# Altium PCB Logger_PCB_6.PcbDoc (part 2 of 2)
Units mm, origin at the board's own origin, x right, y up, seen from the top; angles counter-clockwise.
Board outline 91.13 x 59.14 mm, 2 copper layers (Top Layer, Bottom Layer); 117 components, 70 nets, 364 pads, 397 vias.
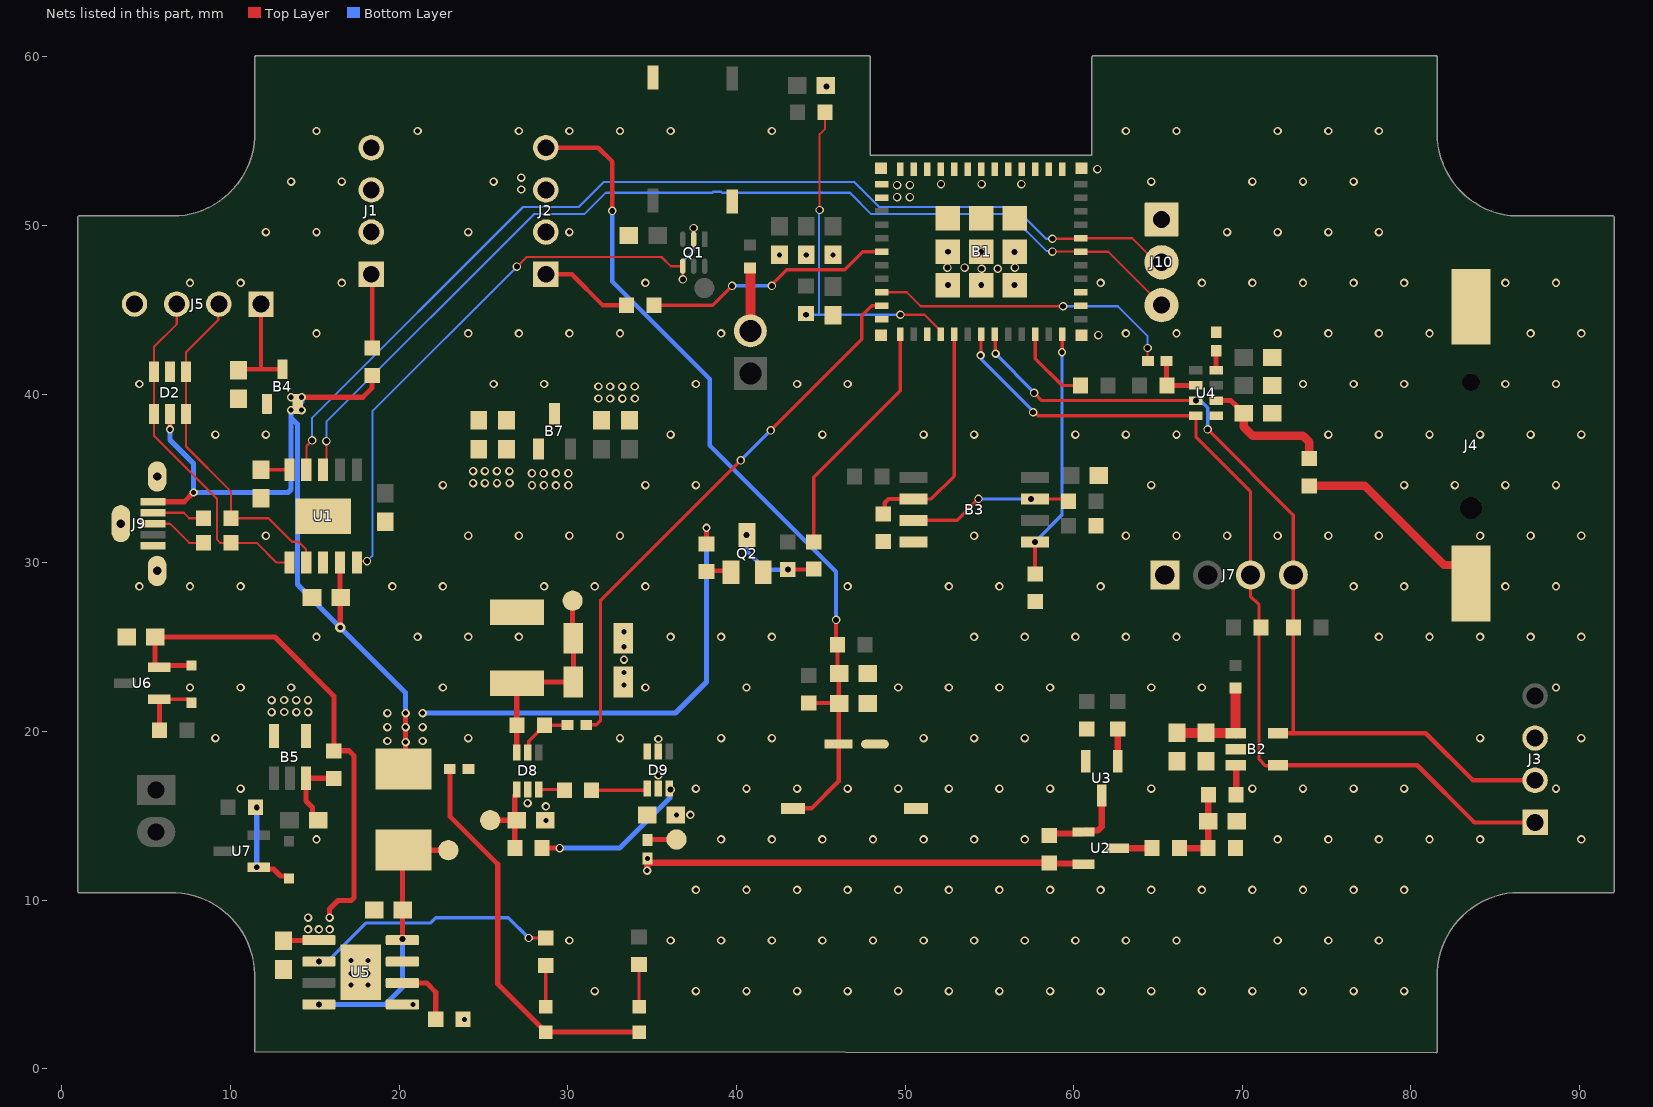
[diagram p2: the nets of this part, all layers, seen from the top]

## Via types
v1: diameter 0.5, hole 0.3, Top Layer to Bottom Layer, tented both sides, 325 vias
v2: diameter 0.5, hole 0.35, Top Layer to Bottom Layer, tented both sides, 71 vias
v3: diameter 0.6, hole 0.3, Top Layer to Bottom Layer, tented both sides, 1 vias

## Nets (pads, with @x,y where several pads share a name; then routed paths per layer and width w, separated by ;. In a path a pad name is that pad's centre, name@x,y a point inside that pad or via, vN(x,y) a via of type N, cw(c..) or ccw(c..) an arc to the next point about the centre after c; other vN are vias at no path point) (continued)
ESP_VBAT: B1.15 R4.2 R5.2 | length 20.8
  Top Layer w0.127: v2(44.133,44.704) R4.2@44.133,44.779 ; v2(44.937,50.916) 44.937,55.415 45.264,55.741 R5.2@45.264,56.706 ; v2(49.721,44.704) 51.157,44.704 52.121,43.74 B1.15@52.121,43.54
  Bottom Layer w0.127: v2(44.133,44.704) 44.894,44.704 ; v2(44.937,50.916) 44.895,50.873 44.895,44.704 ; v2(49.721,44.704) 44.894,44.704
FLASH_SDI: B1.24 B3.5 R18.2 | length 14.9
  Top Layer w0.2: v1(59.309,42.481) 59.315,42.487 59.315,43.534 B1.24@59.321,43.54
  Top Layer w0.254: B3.5@57.702,31.242 v2(57.71,31.234) 57.71,29.337 R18.2@57.721,29.325
  Bottom Layer w0.2: v2(57.71,31.234) 59.309,32.833 v1(59.309,42.481)
FLASH_SDO: B1.16 B3.2 R17.2 | length 13.9
  Top Layer w0.2: B3.2@50.502,33.782 51.562,33.782 52.921,35.141 B1.16@52.921,43.54
  Top Layer w0.254: R17.2@48.704,32.881 48.799,32.976 48.799,33.559 49.022,33.782 B3.2@50.502,33.782
GND: B1.1 B1.2 B1.11 B1.14 B1.36 B1.37 B1.38 B1.39 B1.40 B1.41 B1.42 B1.43 B1.44 B1.45 B1.46 B1.47 B1.48 B1.49 B1.50 B1.51 B1.52 B1.53 B1.54 B1.55 B1.56 B1.57 B1.58 B1.59 B1.60 B1.61 B2.2 B3.4 B4.1 B5.4 B5.5 B7.1 C1.1 C2.1 C3.1 C4.1 C5.1 C6.1 C7.1 C8.1 C9.1 C10.2 C11.1 C12.1 C13.1 C14.1 C15.1 C16.1 C17.1 C18.1 C19.2 C20.1 C21.1 C22.1 C24.1 C25.1 C26.1 C27.1 C28.1 C29.1 C30.1 C31.1 D1.A D2.2 D8.2 D9.2 D9.5 J1.2 J2.2 J2.3 J3.3 J4.2 J5.4 J7.1 J9.5 J9.SH1 J9.SH2 J9.SH3 J10.1 Q2.E R12.2 R14.1 R17.1 R18.1 R19.1 R20.2 R28.1 SW1.2 SW2.2 SW3.2 U1.0 U1.3 U3.2 U4.5 U5.1 U5.3 U5.9
  other v1: 23.876,2.921 20.828,3.81 31.6,4.6 37.6,4.6 40.6,4.6 43.6,4.6 46.6,4.6 49.6,4.6 52.6,4.6 55.6,4.6 58.6,4.6 61.6,4.6 64.6,4.6 67.6,4.6 70.6,4.6 73.6,4.6 76.6,4.6 79.6,4.6 17.145,4.953 18.161,4.953 17.145,5.651 18.161,5.651 17.145,6.413 18.161,6.413 30.1,7.6 36.1,7.6 39.1,7.6 42.1,7.6 45.1,7.6 48.1,7.6 51.1,7.6 54.1,7.6 57.1,7.6 60.1,7.6 63.1,7.6 66.1,7.6 72.1,7.6 75.1,7.6 78.1,7.6 37.6,10.6 40.6,10.6 43.6,10.6 46.6,10.6 49.6,10.6 52.6,10.6 55.6,10.6 58.6,10.6 61.6,10.6 64.6,10.6 67.6,10.6 70.6,10.6 73.6,10.6 76.6,10.6 79.6,10.6 15.1,13.6 39.1,13.6 42.1,13.6 45.1,13.6 48.1,13.6 51.1,13.6 54.1,13.6 57.1,13.6 72.1,13.6 75.1,13.6 78.1,13.6 81.1,13.6 84.1,13.6 90.1,13.6 28.714,14.722 36.449,15.05 37.274,15.05 28.702,15.557 27.622,15.748 10.6,16.6 37.6,16.6 40.6,16.6 43.6,16.6 46.6,16.6 49.6,16.6 52.6,16.6 55.6,16.6 58.6,16.6 64.6,16.6 70.6,16.6 73.6,16.6 76.6,16.6 79.6,16.6 88.6,16.6 35.369,17.399 35.369,19.549 9.1,19.6 24.1,19.6 33.1,19.6 39.1,19.6 42.1,19.6 51.1,19.6 54.1,19.6 57.1,19.6 84.1,19.6 90.1,19.6 12.446,21.145 13.906,21.145 14.605,21.145 13.189,21.149 12.44,21.856 13.901,21.856 14.599,21.856 13.183,21.859 7.6,22.6 10.6,22.6 13.6,22.6 22.6,22.6 34.6,22.6 40.6,22.6 49.6,22.6 52.6,22.6 55.6,22.6 58.6,22.6 64.6,22.6 67.6,22.6 88.6,22.6 33.337,22.74 33.337,23.486 33.337,24.257 33.337,25.019 15.1,25.6 21.1,25.6 24.1,25.6 27.1,25.6 36.1,25.6 39.1,25.6 42.1,25.6 54.1,25.6 57.1,25.6 60.1,25.6 63.1,25.6 66.1,25.6 78.1,25.6 81.1,25.6 84.1,25.6 87.1,25.6 90.1,25.6 33.337,25.908 4.6,28.6 7.6,28.6 10.6,28.6 19.6,28.6 22.6,28.6 28.6,28.6 31.6,28.6 34.6,28.6 46.6,28.6 52.6,28.6 55.6,28.6 61.6,28.6 76.6,28.6 79.6,28.6 85.6,28.6 88.6,28.6 12.1,31.6 24.1,31.6 27.1,31.6 30.1,31.6 33.1,31.6 54.1,31.6 63.1,31.6 66.1,31.6 69.1,31.6 72.1,31.6 75.1,31.6 78.1,31.6 84.1,31.6 87.1,31.6 90.1,31.6 22.6,34.6 27.882,34.596 28.581,34.596 29.298,34.592 30.041,34.596 34.6,34.6 37.6,34.6 64.6,34.6 79.6,34.6 82.6,34.6 85.6,34.6 88.6,34.6 24.39,34.723 25.088,34.723 25.806,34.719 26.549,34.723 27.877,35.306 28.575,35.306 29.293,35.302 30.035,35.306 24.384,35.433 25.082,35.433 25.8,35.429 26.543,35.433 9.1,37.6 12.1,37.6 36.1,37.6 45.1,37.6 51.1,37.6 54.1,37.6 60.1,37.6 63.1,37.6 66.1,37.6 75.1,37.6 78.1,37.6 81.1,37.6 84.1,37.6 87.1,37.6 90.1,37.6 33.235,39.736 31.819,39.739 32.518,39.739 33.978,39.739 31.813,40.45 32.512,40.45 33.23,40.446 33.972,40.45 4.6,40.6 25.6,40.6 28.6,40.6 37.6,40.6 43.6,40.6 46.6,40.6 73.6,40.6 76.6,40.6 79.6,40.6 85.6,40.6 88.6,40.6 15.1,43.6 24.1,43.6 27.1,43.6 30.1,43.6 33.1,43.6 39.1,43.6 63.1,43.6 66.1,43.6 72.1,43.6 75.1,43.6 78.1,43.6 81.1,43.6 87.1,43.6 90.1,43.6 7.6,46.6 10.6,46.6 16.6,46.6 34.6,46.6 61.6,46.6 67.6,46.6 70.6,46.6 73.6,46.6 76.6,46.6 79.6,46.6 85.6,46.6 88.6,46.6 42.556,48.256 44.143,48.256 45.731,48.256 12.1,49.6 15.1,49.6 24.1,49.6 30.1,49.6 69.1,49.6 72.1,49.6 75.1,49.6 78.1,49.6 27.241,52.133 13.6,52.6 16.6,52.6 25.6,52.6 64.6,52.6 70.6,52.6 73.6,52.6 76.6,52.6 27.241,52.832 15.1,55.6 21.1,55.6 27.1,55.6 30.1,55.6 33.1,55.6 36.1,55.6 42.1,55.6 63.1,55.6 66.1,55.6 72.1,55.6 75.1,55.6 78.1,55.6
  other v2: 61.468,43.497 52.546,46.465 54.521,46.465 56.496,46.465 54.546,47.434 55.499,47.434 52.514,47.498 53.53,47.498 56.515,47.498 52.546,48.44 54.521,48.44 56.49,48.434 49.53,51.685 50.292,51.685 49.53,52.387 50.292,52.387 52.133,52.451 54.546,52.451 56.896,52.451 61.404,53.34 45.332,58.229
IND_LED_P: J1.1 R26.1 | length 4.4
  Top Layer w0.254: J1.1@18.351,47.11 18.415,47.046 R26.1@18.415,42.724
IND_LED_S: J2.1 R37.1 | length 5.5
  Top Layer w0.254: J2.1@28.702,47.11 30.233,47.11 32.067,45.276 R37.1@33.476,45.276
LED: B1.6 R37.2 | length 14.9
  Top Layer w0.2: R37.2@35.104,45.276 38.608,45.276 v2(39.751,46.419) ; v2(42.1,46.419) 42.1,46.482 42.986,47.368 46.415,47.368 47.487,48.44 B1.6@48.621,48.44 B1.6@48.632,48.45
  Bottom Layer w0.2: v2(39.751,46.419) v2(42.1,46.419)
LOG: B1.22 R6.1 | length 4.8
  Top Layer w0.2: B1.22@57.721,43.54 57.721,42.101 59.309,40.513 R6.1@60.412,40.513
M_SW: F1.1 J1.3
Mout: C24.2 C25.2 D8.6 D9.6 F1.2 R35.1 TP3.TP? | length 12.3
  Top Layer w0.305: D8.6@26.972,18.753 26.972,22.84 F1.2@26.987,22.855 27.056,22.924 C24.2@30.338,22.924 C25.2@30.338,25.527 30.29,25.576 TP3.TP?@30.29,27.749
NetB2_1: B2.1 C12.2 C13.2 FB2.1 | length 6.2
  Top Layer w0.6: C13.2@66.125,19.916 66.137,19.904 B2.1@69.605,19.904 ; FB2.1@69.596,22.566 69.596,19.913 B2.1@69.605,19.904 ; B2.1@69.618,19.892 B2.1@69.605,19.904
NetB2_3: B2.3 R13.1 | length 1.7
  Top Layer w0.381: B2.3@69.618,17.992 69.638,17.972 R13.1@69.638,16.251
NetB4_3: B4.3 C19.1 J5.1 | length 6.5
  Top Layer w0.254: C19.1@10.477,41.427 10.525,41.474 11.803,41.474 ; J5.1@11.811,45.339 11.811,41.482 11.803,41.474 ; B4.3@13.081,41.474 11.803,41.474
NetB5_3: B5.3 C23.2 R31.1 | length 5.5
  Top Layer w0.305: B5.3@14.478,17.226 14.478,16.864 14.478,16.717 14.478,15.875 14.867,15.486 14.867,15.066 C23.2@15.201,14.732 ; B5.3@14.623,16.717 14.476,16.864 B5.3@14.476,17.228 14.484,17.22 R31.1@16.129,17.22 16.109,17.22 R31.1@15.817,16.928
NetC11_2: C11.2 U1.10 | length 1.7
  Top Layer w0.2: C11.2@11.811,35.521 13.489,35.521 U1.10@13.494,35.516
NetC14_2: C14.2 R10.1 R13.2 R14.2 | length 4.9
  Top Layer w0.381: R10.1@66.282,13.081 R14.2@67.968,13.081 67.989,13.102 67.989,16.23 R13.2@68.01,16.251
NetC26_2: C26.2 D8.1 R34.1 R38.2 TP2.TP? | length 5.1
  Top Layer w0.305: TP2.TP?@25.4,14.732 C26.2@26.858,14.732 ; R34.1@26.858,13.081 C26.2@26.858,14.732 ; C26.2@26.963,14.732 C26.2@26.858,14.732 ; D8.1@26.972,16.553 26.972,16.303 26.858,16.189 C26.2@26.858,14.732
NetC27_2: C27.2 D9.1 R36.2 R39.2 TP4.TP? | length 5.1
  Top Layer w0.2: R36.2@31.421,16.51 34.626,16.51 D9.1@34.719,16.603
  Top Layer w0.305: R39.2@34.734,13.567 34.745,13.578 36.438,13.578 TP4.TP?@36.449,13.589
NetD4_1: D4.1 R30.2 | length 2.5
  Top Layer w0.2: D4.1@34.227,3.671 R30.2@34.227,6.171
NetD5_1: D5.1 R29.2 | length 2.4
  Top Layer w0.2: D5.1@28.702,3.671 R29.2@28.702,6.108
NetD6_1: D6.1 R32.2 U6.1 | length 3.8
  Top Layer w0.2: U6.1@5.779,21.91 7.47,21.91 D6.1@7.683,21.696
  Top Layer w0.305: U6.1@5.779,21.91 5.79,21.898 R32.2@5.79,20.066
NetD7_2: D7.2 R33.1 U7.1 | length 5.8
  Top Layer w0.305: v2(11.559,11.94) 11.668,11.832 12.552,11.832 12.963,11.421 13.324,11.421 D7.2@13.462,11.282 ; U7.1@11.65,11.94 U7.1@11.684,11.94
  Bottom Layer w0.305: v2(11.557,15.494) 11.559,15.492 v2(11.559,11.94)
NetD8_3: D8.3 R36.1 | length 1.5
  Top Layer w0.2: D8.3@28.273,16.553 29.75,16.553 R36.1@29.793,16.51
NetD9_3: D9.3 R34.2 | length 9.3
  Top Layer w0.305: R34.2@28.486,13.081 v2(29.527,13.081)
  Bottom Layer w0.305: v2(29.527,13.081) 33.084,13.081 36.061,16.059 36.061,16.504 v2(36.099,16.542)
NetFB1_2: FB1.2 J8.2 | length 3.7
  Top Layer w0.6: J8.2@40.831,43.752 FB1.2@40.831,47.463
NetJ4_1: J4.1 R22.1 | length 12.1
  Top Layer w0.5: R22.1@73.977,34.556 77.268,34.556 81.959,29.865 82.666,29.865 83.566,28.965 J4.1@83.566,28.779
NetJ9_2: J9.2 R42.1 | length 3.1
  Top Layer w0.127: J9.2@5.402,32.966 7.23,32.966 7.556,32.639 R42.1@8.394,32.639
NetJ9_3: J9.3 R41.1 | length 3.5
  Top Layer w0.127: J9.3@5.402,32.316 6.419,32.316 7.556,31.178 R41.1@8.394,31.178
NetQ2_B: Q2.B R25.1 | length 1.5
  Top Layer w0.254: R25.1@38.227,29.476 38.278,29.526 39.607,29.526 Q2.B@39.69,29.443
NetQ2_C: Q2.C R23.2 R24.2 | length 5.4
  Top Layer w0.254: v2(40.597,31.644) Q2.C@40.64,31.644 ; R23.2@43.053,29.603 44.578,29.603 R24.2@44.591,29.616
  Bottom Layer w0.254: v2(40.597,31.644) 40.597,30.713 41.719,29.591 v2(43.053,29.591)
NetR9_1: R9.1 U2.1 U3.3 | length 5.4
  Top Layer w0.381: R9.1@58.547,13.831 58.749,14.034 58.749,14.015 58.822,13.942 60.49,13.942 U2.1@60.668,14.12 ; U2.1@60.579,14.031 U2.1@60.668,14.12 ; U3.3@61.658,16.192 61.658,14.343 61.435,14.12 U2.1@60.668,14.12
NetR10_2: R10.2 U2.3 | length 2
  Top Layer w0.381: U2.3@62.611,13.081 R10.2@64.655,13.081
NetR11_1: R11.1 U3.1 | length 1.9
  Top Layer w0.381: U3.1@62.609,18.224 62.61,18.226 62.61,20.14 R11.1@62.611,20.141
NetR20_1: R20.1 U4.8 | length 1.2
  Top Layer w0.3: U4.8@68.453,41.413 R20.1@68.453,42.567
NetR28_2: R28.2 U5.2 | length 3.8
  Top Layer w0.305: U5.2@20.191,5.08 20.197,5.074 21.634,5.074 22.173,4.535 R28.2@22.173,2.921
PB_IN: C7.2 C8.2 D1.C J2.4 R7.1 R8.1 SW3.1 | length 51.8
  Top Layer w0.254: J2.4@28.702,54.61 31.813,54.61 32.639,53.785 v2(32.639,50.863) ; SW3.1@43.368,15.436 44.455,15.436 46.064,17.045 D1.C@46.064,19.246 C8.2@46.064,21.682 ; R7.1@44.282,21.682 C8.2@46.064,21.682 ; v2(45.91,26.607) 45.91,25.23 R8.1@45.995,25.146 45.995,23.542 C7.2@46.099,23.437 ; C7.2@46.064,23.437 C8.2@46.064,21.682 ; C8.2@46.099,21.659 46.076,21.682 C8.2@46.064,21.682
  Bottom Layer w0.254: v2(32.639,50.863) 32.639,46.672 38.417,40.894 38.417,36.96 45.91,29.467 v2(45.91,26.607)
R\T\C\_\I\N\T\: B1.9 R3.1 | length 18.4
  Top Layer w0.127: B1.9@48.621,46.04 50.099,46.04 50.931,45.208 59.368,45.208 v2(59.372,45.212) ; v2(64.389,42.735) 64.389,42.002 64.36,41.974 R3.1@64.411,41.974
  Bottom Layer w0.127: v2(59.372,45.212) 62.611,45.212 64.389,43.434 v2(64.389,42.735)
REG_IN: B7.3 C28.2 C31.2 J1.4
RTC_INT: R3.2 R21.1 U4.2 | length 3.2
  Top Layer w0.3: R3.2@65.51,41.974 65.515,41.969 65.515,40.518 R21.1@65.52,40.513 U4.2@67.253,40.513
RTS_USB: Q1.2 Q1.4 U1.5 | length 36.8
  Top Layer w0.127: U1.5@17.494,30.016 17.577,30.099 v2(18.098,30.099) ; v2(26.987,47.561) 27.559,48.133 35.56,48.133 36.108,47.585 Q1.4@36.815,47.585 36.822,47.578 36.822,46.807 v2(36.83,46.799) ; Q1.2@37.465,49.189 v2(37.465,49.847)
  Bottom Layer w0.127: v2(18.098,30.099) 18.415,30.416 18.415,38.989 v2(26.987,47.561) ; v2(36.83,46.799) 36.83,47.879 37.465,48.514 v2(37.465,49.847)
RX_USB: B1.31 J10.2 U1.9 | length 61.4
  Top Layer w0.127: U1.9@14.494,35.516 14.507,35.529 14.507,36.923 v2(14.842,37.259) ; v2(58.737,49.212) 60.394,49.212 B1.31@60.421,49.24 63.472,49.24 64.897,47.816 J10.2@65.215,47.816
  Bottom Layer w0.127: v2(14.842,37.259) 14.842,38.591 27.343,51.092 30.645,51.092 32.131,52.578 46.99,52.578 48.476,51.092 56.477,51.092 58.356,49.212 v2(58.737,49.212)
SCL: B1.19 B2.5 J3.2 J7.4 R1.1 U4.3 | length 52.9
  Top Layer w0.2: B1.19@55.321,43.54 55.344,43.517 55.344,42.427 v1(55.367,42.404) ; v2(57.658,40.069) 58.108,39.619 v2(67.248,39.619) U4.3@67.253,39.613 ; v2(67.945,37.91) 73.025,32.829 73.025,26.162 73.025,20.019 73.152,19.892
  Top Layer w0.254: B2.5@72.118,19.892 73.152,19.892 80.883,19.892 83.673,17.101 J3.2@87.359,17.101
  Bottom Layer w0.2: v1(55.367,42.404) 55.367,42.382 57.658,40.091 v2(57.658,40.069) ; v2(67.248,39.619) 67.305,39.561 67.563,39.561 67.945,39.179 v2(67.945,37.91)
SDA: B1.18 B2.4 J3.1 J7.3 R2.1 U4.4 | length 55.5
  Top Layer w0.2: v1(54.483,42.291) 54.502,42.31 54.502,43.521 B1.18@54.521,43.54 ; v2(57.594,38.925) 57.676,38.925 57.888,38.713 U4.4@67.253,38.713 67.253,37.458 70.485,34.227 J7.3@70.485,29.273 70.485,28.003 70.993,27.495 70.993,18.351 71.374,17.97 72.097,17.97 B2.4@72.118,17.992
  Top Layer w0.254: B2.4@72.118,17.992 80.37,17.992 83.76,14.601 J3.1@87.359,14.601
  Bottom Layer w0.2: v1(54.483,42.291) 54.54,42.234 54.54,42.043 57.594,38.989 v2(57.594,38.925)
ST_PIN: D8.5 R35.2 R40.2 | length 3.4
  Top Layer w0.2: D8.5@27.622,18.753 27.678,18.809 27.678,19.411 28.616,20.349 R35.2@28.616,20.369 29.979,20.369 R40.2@29.994,20.383
ST_PWR: B1.10 R40.1 | length 32.8
  Top Layer w0.2: R40.1@31.093,20.383 31.686,20.383 31.941,20.637 31.941,27.749 v2(40.259,36.068) ; v2(42.037,37.846) 47.434,43.243 47.434,44.64 48.034,45.24 B1.10@48.621,45.24
  Bottom Layer w0.2: v2(40.259,36.068) v2(42.037,37.846)
STNDBY: R29.1 U5.6 | length 15
  Top Layer w0.2: v2(15.24,6.35) U5.6@15.242,6.35 ; v2(27.686,7.747) 28.69,7.747 R29.1@28.702,7.735
  Bottom Layer w0.2: v2(15.24,6.35) 15.748,6.35 18.034,8.636 21.844,8.636 22.162,8.954 26.479,8.954 v2(27.686,7.747)
TP4056_VCC: C20.2 R27.2 TP1.TP? U5.4 U5.8 | length 16.2
  Top Layer w0.305: v2(15.24,3.81) U5.8@15.242,3.81 ; v2(20.193,7.683) 20.191,7.685 20.191,9.372 C20.2@20.218,9.398 20.191,9.424 20.191,12.902 R27.2@20.244,12.954 ; R27.2@20.256,12.967 20.269,12.954 TP1.TP?@22.924,12.954
  Bottom Layer w0.305: v2(15.24,3.81) 19.177,3.81 20.193,4.826 v2(20.193,7.683)
TX_USB: B1.30 J10.3 U1.8 | length 60.9
  Top Layer w0.127: U1.8@15.494,35.516 15.684,35.706 v2(15.684,37.211) ; v2(58.737,48.45) 60.411,48.45 B1.30@60.421,48.44 62.05,48.44 J10.3@65.215,45.276
  Bottom Layer w0.127: v2(15.684,37.211) 15.684,38.354 28.003,50.673 30.988,50.673 32.258,51.943 38.567,51.943 38.627,52.002 39.097,52.002 39.157,51.943 46.736,51.943 48.006,50.673 56.197,50.673 58.394,48.476 58.712,48.476 v2(58.737,48.45)
USB_D+: B1.26
USB_D-: B1.27
USB_DET: B1.12 R24.1 | length 14.4
  Top Layer w0.2: R24.1@44.591,31.243 44.591,35.066 49.721,40.196 B1.12@49.721,43.54
USB_PRG_N: D2.1 D2.6 J5.2 R42.2 U1.2 | length 20.6
  Top Layer w0.127: J5.2@9.311,45.339 9.279,45.307 9.279,44.394 7.364,42.479 D2.1@7.364,41.319 D2.6@7.364,38.818 7.364,36.896 10.021,34.238 R42.2@10.021,32.639 12.255,32.639 13.652,31.242 14.034,31.242 14.488,30.787 14.488,30.022 U1.2@14.494,30.016
USB_PRG_P: D2.3 D2.4 J5.3 R41.2 U1.1 | length 20.9
  Top Layer w0.127: J5.3@6.811,45.339 6.811,44.149 5.463,42.801 D2.3@5.463,41.319 D2.4@5.463,38.818 5.463,37.526 9.207,33.782 9.207,31.369 9.398,31.178 R41.2@10.021,31.178 11.557,31.178 12.719,30.016 U1.1@13.494,30.016
VBACK: C18.2 R22.2 U4.6 | length 8
  Top Layer w0.3: U4.6@68.453,39.613 69.328,39.613 69.679,39.262 69.679,39.212 70.029,38.862 C18.2@70.079,38.862
  Top Layer w0.5: C18.2@70.079,38.862 70.079,38.061 70.612,37.529 73.596,37.529 73.977,37.148 R22.2@73.977,36.183
VBUS: B4.2 C10.1 D2.5 D4.2 D5.2 J9.1 R25.2 R26.2 R27.1 R38.1 U1.4 | length 104
  Top Layer w0.305: J9.1@5.402,33.616 7.263,33.616 v1(7.81,34.163) ; v1(6.413,37.91) D2.5@6.413,38.818 ; v1(14.224,39.814) 17.843,39.814 18.401,40.372 18.401,41.082 R26.2@18.415,41.096 ; U1.4@16.494,30.016 16.494,27.981 C10.1@16.535,27.94 16.51,27.915 v3(16.51,26.162) ; R27.1@20.256,17.767 20.383,17.894 v1(20.383,19.367) v1(20.383,20.256) v1@20.383,21.018 ; R38.1@23.009,17.78 23.009,14.964 25.853,12.12 25.853,5.02 D5.2@28.702,2.171 D4.2@34.227,2.171 ; R25.2@38.227,31.103 v1(38.227,32.067)
  Bottom Layer w0.305: v1(6.413,37.91) 6.413,37.274 7.81,35.877 v1(7.81,34.163) 13.41,34.163 13.589,34.342 v1(13.589,39.052) 13.642,39.052 13.874,39.285 13.988,39.285 14.224,39.521 v1(14.224,39.814) v1(13.589,39.814) ; 13.626,38.561 13.97,38.217 13.97,28.702 v3(16.51,26.162) 20.383,22.288 v1(20.383,21.082) ; v1(21.399,21.082) 36.386,21.082 38.227,22.924 v1(38.227,32.067)
  other v1: 19.304,19.431 21.399,19.431 19.304,20.256 21.399,20.256 19.304,21.082 14.224,39.052
Vin2: C21.2 C22.2 D6.2 R9.2 R31.2 R39.1 U2.2 U5.5 U6.2 | length 59.7
  Top Layer w0.305: D6.2@7.683,23.897 6.246,23.897 6.159,23.81 5.651,23.81 5.524,23.937 5.524,25.566 C22.2@5.549,25.59 12.636,25.59 16.129,22.098 R31.2@16.129,18.848 17.03,18.848 17.335,18.542 17.335,10.148 17.157,9.97 16.383,9.97 15.875,9.461 v1(15.875,8.954) ; C21.2@13.144,7.581 13.162,7.598 15.22,7.598 U5.5@15.242,7.62
  Top Layer w0.381: v1(34.703,11.747) 34.719,11.763 34.719,12.452 v1(34.734,12.468) ; R39.1@34.948,12.204 R9.2@58.547,12.204 58.583,12.167 60.543,12.167 U2.2@60.579,12.131
  other v1: 14.605,8.255 15.24,8.255 15.875,8.255 14.605,8.954
WP_HLD: B3.3 B3.7 R16.1 | length 9.5
  Top Layer w0.2: B3.3@50.502,32.512 53.086,32.512 v2(54.356,33.782) ; B3.7@57.702,33.782 59.575,33.782 R16.1@59.702,33.655
  Bottom Layer w0.2: v2(54.356,33.782) v2(57.468,33.782)
pads on no net: B1.4 B1.7 B1.17 B1.25 B1.28 B1.29 B1.32 B1.33 B1.34 B1.35 B5.1 D8.4 D9.4 J4.MP1 J4.MP2 J9.4 U4.1

## Polygon pours and split planes (outlines as drawn)
GND on Top Layer "GND_L01_P028" (solid, pour order 28): 1.714,11.43 1.714,48.959 9.144,48.958 ccw(c9.144,52.451) 12.636,52.451 12.636,58.928 42.862,59.118 46.419,59.118 46.482,53.848 62.357,53.848 62.357,58.928 79.819,58.928 79.819,52.768 ccw(c83.947,52.768) 83.947,48.641 90.742,48.641 90.742,12.137 83.82,12.002 ccw(c83.82,8.128) 79.947,8.128 79.947,2.413 cw(c79.883,2.413) 79.883,2.349 13.462,2.349 cw(c13.462,2.413) 13.399,2.413 13.399,8.001 ccw(c10.344,8.001) 10.344,11.056 1.714,11.113
REG_IN on Top Layer "REG_IN_L01_P023" (solid, pour order 23): 17.399,55.435 17.399,53.785 20.13,53.785 22.352,51.562 22.352,38.798 23.431,37.719 29.464,37.719 29.718,37.973 29.718,39.306 24.13,39.306 23.558,39.878 23.558,51.943 20.002,55.435
M_SW on Top Layer "M_SW_L01_P022" (solid, pour order 22): 26.479,26.289 20.32,32.448 20.32,50.546 19.558,51.308 17.272,51.308 17.272,52.895 19.939,52.895 21.59,51.244 21.59,33.02 26.797,27.813 27.686,27.813 27.686,26.289
3V3D on Top Layer "3V3D_L01_P025" (solid, pour order 25): 29.718,37.465 34.671,37.465 34.798,37.338 34.798,36.131 34.544,35.877 29.718,35.877
Mout on Top Layer "MOUT_L01_P021" (solid, pour order 21): 26.607,18.605 26.607,17.653 26.67,17.59 34.798,17.59 34.925,17.716 34.925,19.304 34.417,19.304 34.417,18.034 27.178,18.034 27.178,18.605
Mout on Top Layer "MOUT_L01_P019" (solid, pour order 19): 26.607,18.224 26.607,22.034 25.336,22.034 25.336,23.558 25.4,23.622 29.718,23.622 29.718,26.543 30.988,26.543 30.988,21.907 30.861,22.034 27.432,22.034 27.432,21.971 27.432,20.002 27.178,19.748 27.178,18.224
Vin2 on Top Layer "VIN2_L01_P018" (solid, pour order 18): 17.209,9.461 17.59,9.842 17.59,19.113 16.573,19.113 16.573,22.288 13.144,25.717 5.014,25.717 5.014,23.558 8.509,23.558 8.509,24.511 8.826,24.828 12.89,24.828 15.684,22.034 15.684,18.224 16.954,18.224 16.954,10.414 14.287,10.414 14.287,7.302 16.192,7.302 16.192,9.461
BAT_P on Top Layer "BAT_P_L01_P017" (solid, pour order 17): 6.794,15.621 3.683,15.621 3.302,16.002 3.302,23.177 4.381,23.177 4.381,17.97 4.826,17.526 6.794,17.526
B- on Top Layer "B-_L01_P016" (solid, pour order 16): 10.858,14.351 10.858,13.335 11.112,13.081 14.287,13.081 14.287,15.176 13.843,15.621 13.843,18.098 13.208,18.098 13.144,18.034 13.144,15.518 12.827,15.201 12.827,14.351
BAT_N on Top Layer "BAT_N_L01_P015" (solid, pour order 15): 4.318,15.05 6.667,15.05 6.942,14.775 6.942,13.632 7.366,13.208 10.351,13.208 10.351,12.383 10.223,12.255 5.143,12.255 4.318,13.081
Vin2 on Top Layer "VIN2_L01_P014" (solid, pour order 14): 33.972,12.827 33.972,11.747 35.433,11.747 35.433,12.827
NetC27_2 on Top Layer "NETC27_2_L01_P011" (solid, pour order 11): 34.48,17.081 34.48,15.748 34.29,15.557 34.29,13.144 34.353,13.081 35.179,13.081 35.179,15.621 34.989,15.811 34.989,17.081
Vin2 on Top Layer "VIN2_L01_P008" (solid, pour order 8): 14.287,7.302 14.287,9.271 16.192,9.271 16.192,7.302
NetC26_2 on Top Layer "NETC26_2_L01_P006" (solid, pour order 6): 27.178,16.129 27.178,17.018 25.527,17.018 24.447,18.098 23.749,18.098 23.749,17.462 25.082,16.129 26.289,16.129
VBUS on Top Layer "VBUS_L01_P004" (solid, pour order 4): 22.034,17.335 23.431,17.335 23.431,18.351 22.034,18.351 22.034,21.78 21.971,21.844 18.669,21.844 18.605,21.78 18.605,16.573 22.034,16.573
VBUS on Top Layer "VBUS_L01_P003" (solid, pour order 3): 13.271,38.735 14.777,38.735 14.795,38.735 14.795,38.733 14.795,40.132 13.271,40.132
TP4056_VCC on Top Layer "TP4056_VCC_L01_P001" (solid, pour order 1): 18.605,14.287 18.605,11.747 19.367,10.986 19.367,7.239 21.209,7.239 21.209,10.858 21.971,11.62 21.907,11.684 21.907,14.287
NetB4_3 on Top Layer "NETB4_3_L01_P000" (solid, pour order 0): 10.922,46.101 10.922,42.989 10.731,42.989 9.779,42.037 9.779,40.831 13.779,40.831 13.779,46.101
GND on Bottom Layer "GND_L02_P026" (solid, pour order 26): 1.714,11.557 1.714,49.085 9.144,49.085 ccw(c9.144,52.578) 12.636,52.578 12.636,59.055 42.862,59.245 46.419,59.245 46.482,53.975 62.357,53.975 62.357,59.055 79.819,59.055 79.819,52.895 ccw(c83.947,52.895) 83.947,48.768 90.742,48.768 90.742,12.264 83.82,12.128 ccw(c83.82,8.255) 79.947,8.255 79.947,2.54 cw(c79.883,2.54) 79.883,2.476 13.462,2.476 cw(c13.462,2.54) 13.399,2.54 13.399,8.128 ccw(c10.344,8.128) 10.344,11.183 1.714,11.24
VBUS on Bottom Layer "VBUS_L02_P002" (solid, pour order 2): 14.478,38.163 14.224,37.91 14.224,35.179 14.224,29.337 20.637,22.923 20.637,21.844 21.971,21.844 22.034,21.78 22.034,16.51 18.669,16.51 18.605,16.573 18.605,21.78 18.669,21.844 19.621,21.844 19.621,22.543 13.335,28.829 13.335,40.132 14.478,40.132
Vin2 on Bottom Layer "VIN2_L02_P007" (solid, pour order 7): 14.287,7.302 14.287,10.16 14.414,10.287 32.575,10.287 34.29,12.002 34.29,12.827 35.179,12.827 35.179,11.62 33.02,9.461 16.192,9.461 16.192,7.302

## Silkscreen, mask and mechanical layers (free items; w line width, h text height)
Top Overlay:
  text "POWER" at 16.556,57.831 h1
  text "BTN" at 27.795,57.767 h1
  text "EN" at 32.657,57.64 h0.85 r90
  text "PB" at 24.32,56.134 h0.8
  text "SW_I" at 12.763,54.616 h0.8
  text "BOOT" at 43.071,53.132 h0.85 r90
  text "SW_O" at 12.573,51.949 h0.8
  text "GND" at 66.929,50.165 h0.8
  text "GND" at 2.522,49.258 h0.8
  text "DN" at 8.944,49.251 h0.8
  text "VUSB" at 11.484,49.251 h0.8
  text "DP" at 6.35,49.212 h0.8
  text "GND" at 22.86,49.212 h0.8
  text "(-)" at 82.469,47.988 h1
  text "RX" at 66.865,47.625 h0.8
  text "IND" at 22.924,46.609 h0.8
  text "TX" at 66.802,45.021 h0.8
  text "GND" at 65.913,31.369 h0.8 r90
  text "3V3" at 68.224,31.317 h0.8 r90
  text "SDA" at 70.827,31.317 h0.8 r90
  text "SCL" at 73.494,31.254 h0.8 r90
  text "(+)" at 82.405,25.001 h1
  text "3V3" at 82.94,21.853 h0.6
  text "GND" at 82.94,19.25 h0.6
  text "B+" at 9.144,17.018 h0.8 r90
  text "SCL" at 82.877,16.71 h0.6
  text "SENSOR" at 81.869,15.667 h1 r90
  text "SDA" at 82.877,14.297 h0.6
  text "B-" at 9.144,13.525 h0.8 r90
  text "TEST" at 45.385,11.73 h1
  text "ULP DATA LOGGER V1" at 39.624,6.825 h2.5
  text "Designed by" at 48.578,5.179 h1.2
  text "M.A.Pathiraja (2024AE17)" at 42.545,2.689 h1.8
  text "CHG" at 36.068,2.032 h0.8 r90
  text "STD" at 30.734,1.905 h0.8 r90
Mechanical 1:
  lines w0.1: 6.25,50.5 ccw(c6.5,55.5) 11.5,55.25 ; 6.732,10.489 cw(c6.482,5.489) 11.482,5.239 ; 81.502,55.732 ccw(c86.502,55.482) 86.252,50.482 ; 81.509,5.752 cw(c86.509,5.502) 86.759,10.502
  lines w0.127: 6.732,10.5 1,10.5 1,50.5 6.985,50.5 ; 11.5,5.588 11.5,1 81.5,1 81.5,5.752 ; 11.5,55.25 11.5,60 47.442,60 47.879,60 47.879,58.991 ; 47.879,59 47.879,54.102 61.151,54.102 61.151,60.008 81.5,60.008 ; 81.5,55.118 81.5,60 ; 85.788,50.5 92,50.5 92,10.5 85.979,10.5
Dimensions:
  circle w0.01: c86.5,30.5 r1.5
  circle w0.01: c6.881,32.786 r1.5
  text "reduced 2mm from each side" at 36.368,73.833 h1
  text "93mm" at 40.559,63.165 h1
  text "92mm OK" at 38.971,61.069 h1
  text "61mm" at 99.395,29.891 h1 r90
  text "60mm OK" at 97.236,28.113 h1 r90
Mechanical 13:
  circle w0.01: c24.003,6.985 r1.5
  circle w0.01: c69,7 r1.5
  circle w0.01: c69,54 r1.5
  circle w0.01: c24,54 r1.5
  lines w0.127: 92.964,0 93,0

## Dimensions
81.5,1 to 47.442,60 on Dimensions
1,10.5 to 92,10.5 on Dimensions
1,50.5 to -0.318,10.5 on Dimensions
11.5,60 to 47.442,60 on Dimensions
0,0 to 1,10.5 on Dimensions
0,0 to 11.5,1 on Dimensions